# Altium PCB PCB2.PcbDoc
Units mm, origin at the board's own origin, x right, y up, seen from the top; angles counter-clockwise.
Board outline 87.63 x 70.74 mm, 2 copper layers (Top Layer, Bottom Layer); 20 components, 21 nets, 83 pads, 0 vias.
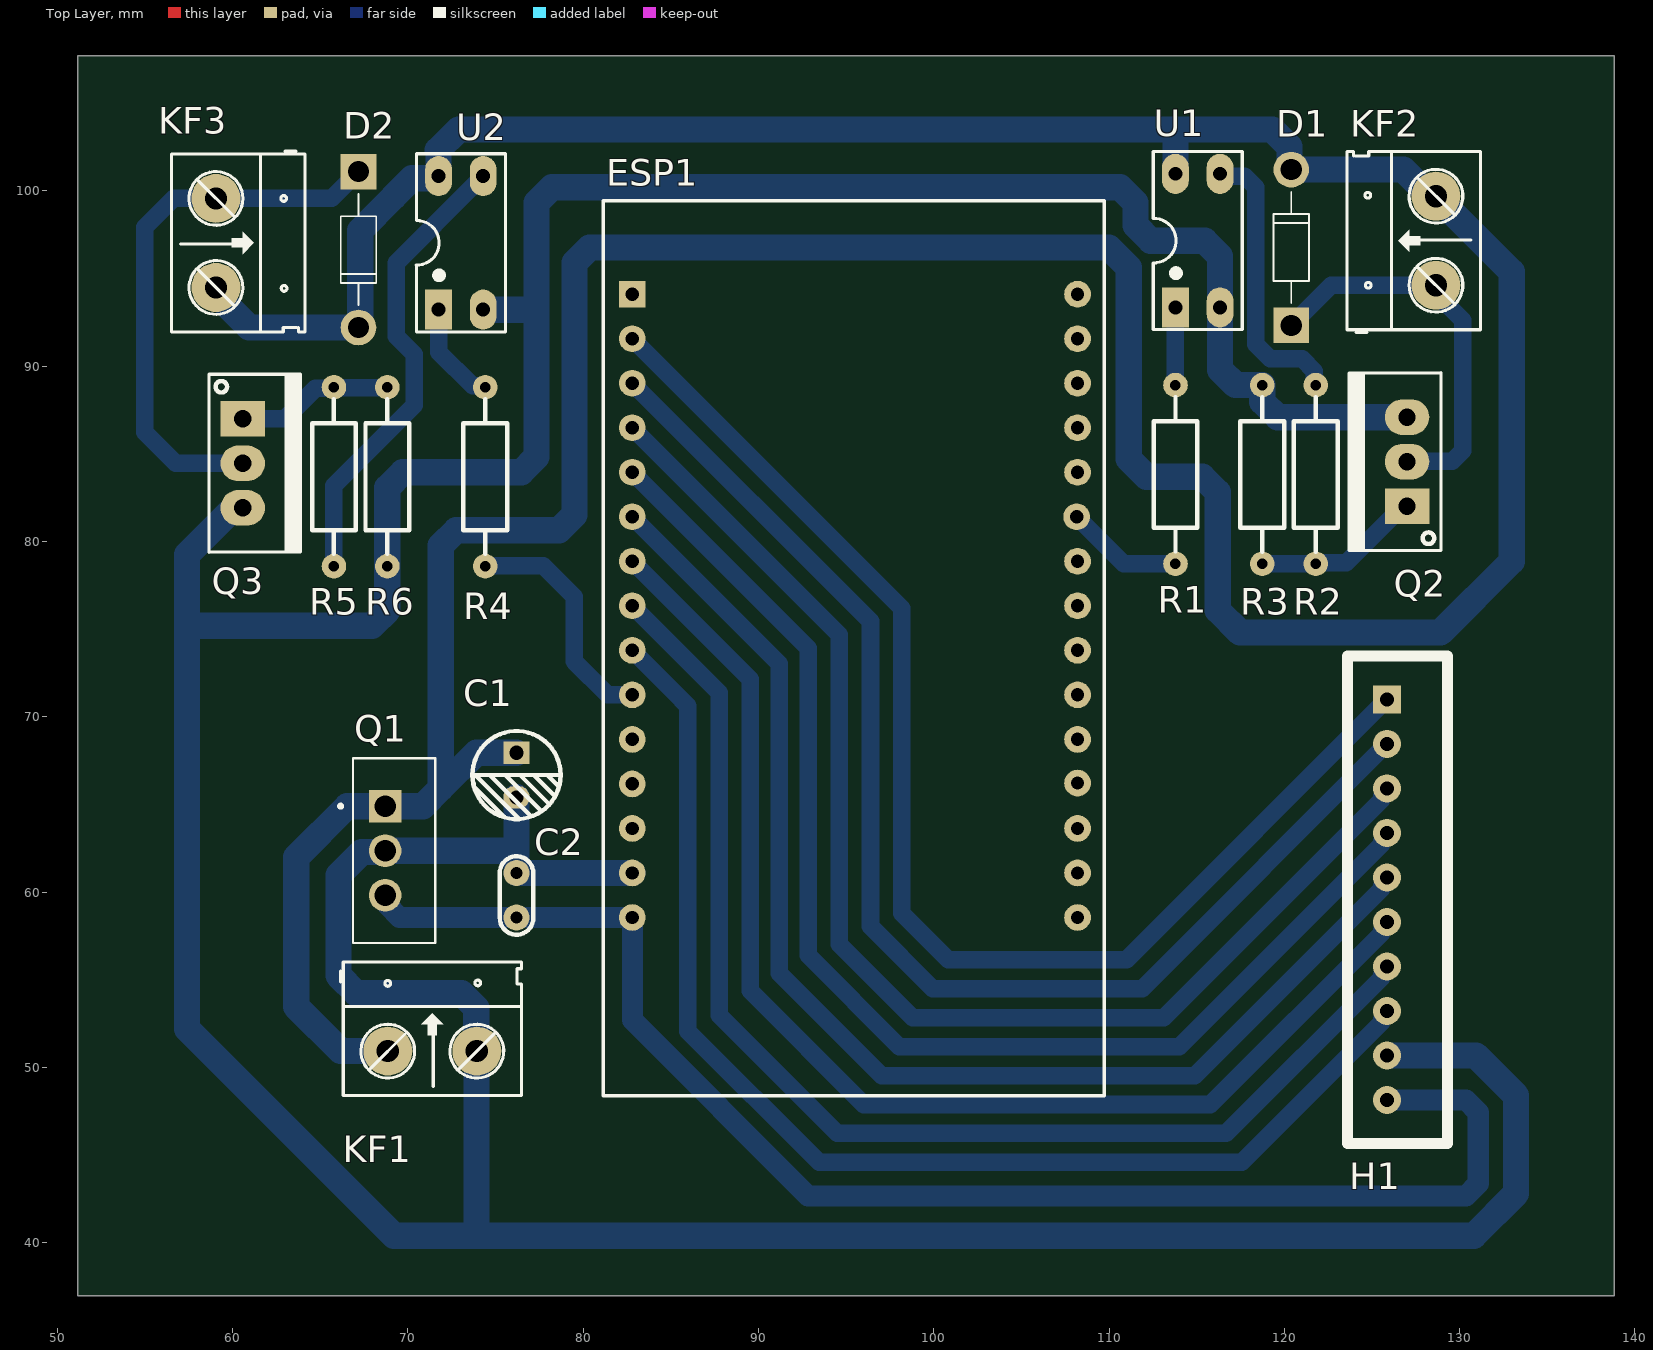
[diagram p0: Top Layer view]
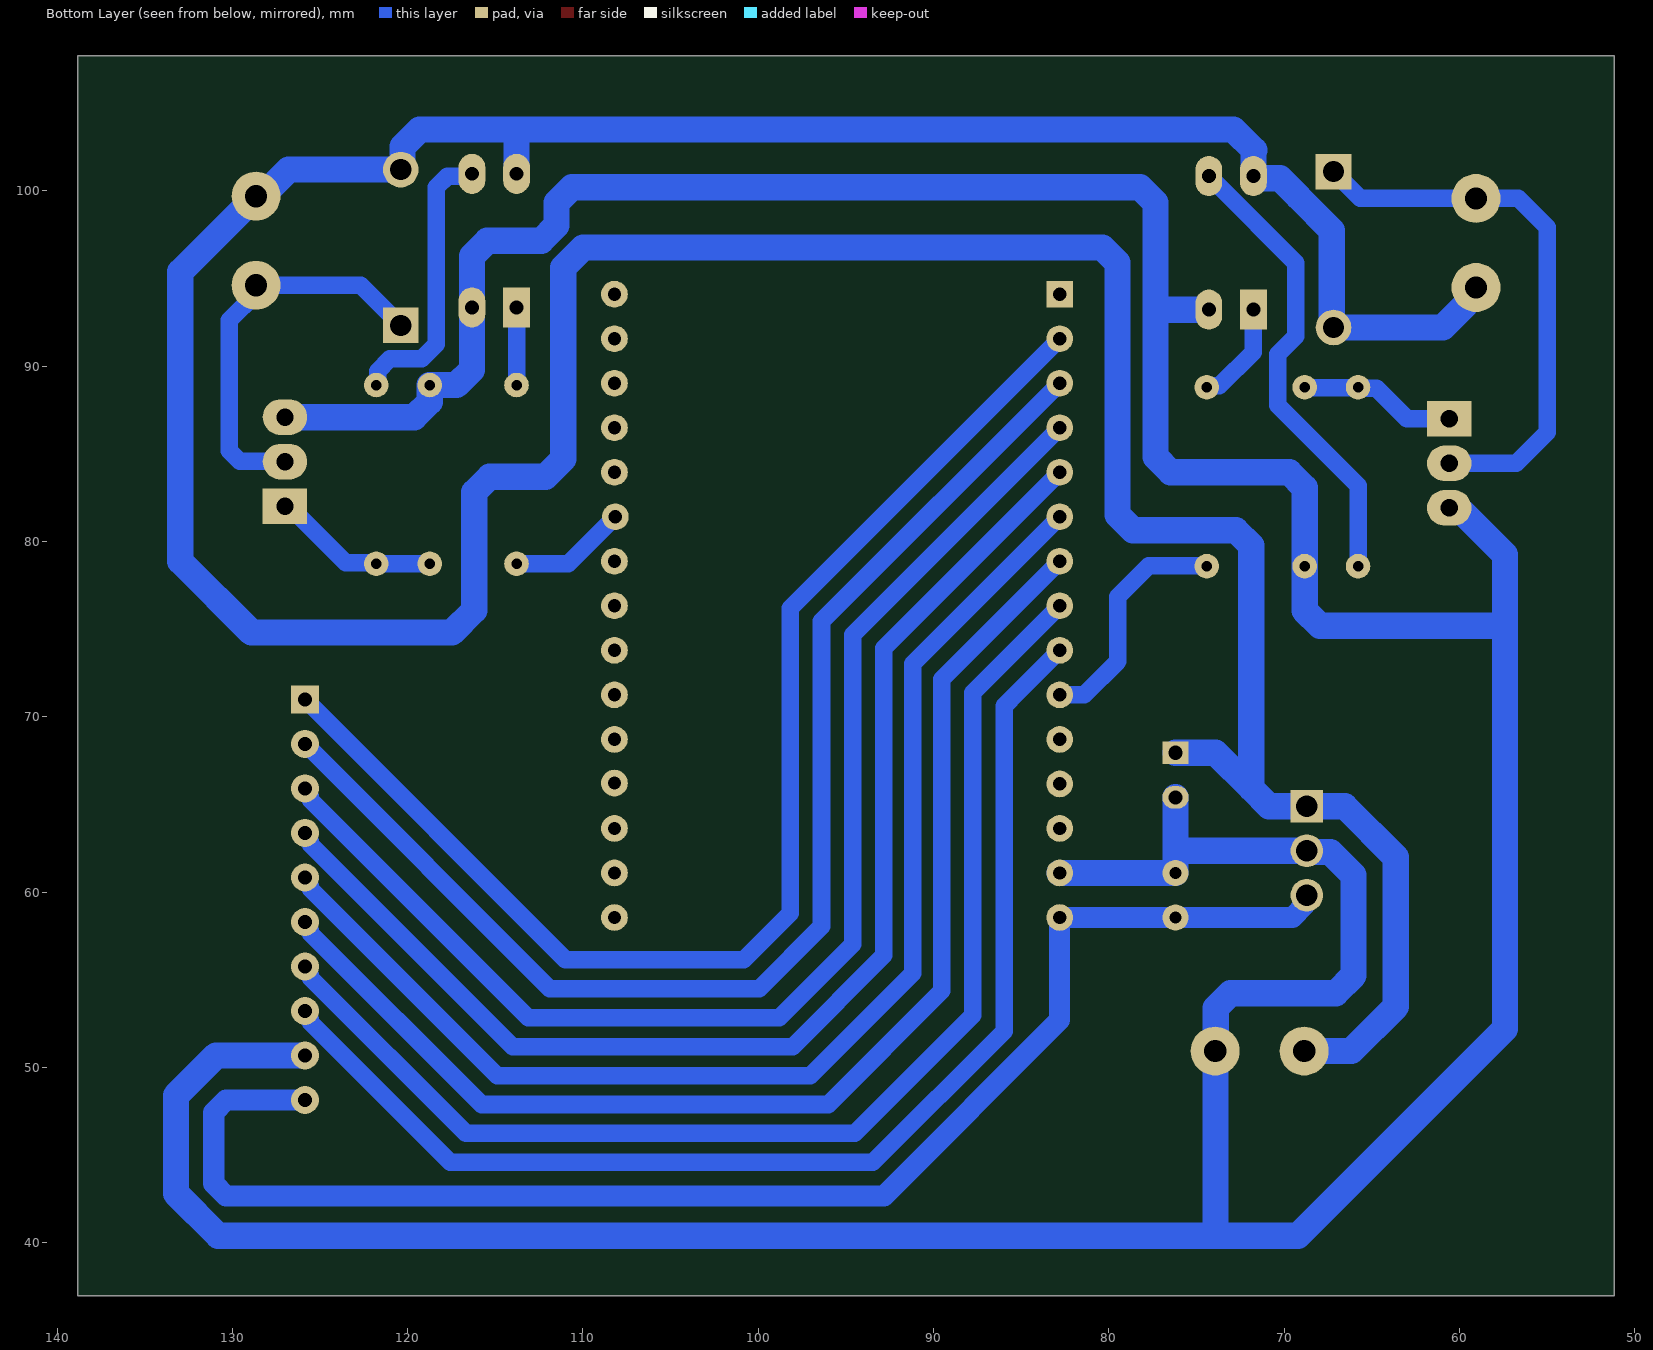
[diagram p1: Bottom Layer view, seen from below]

## Layer stack, top to bottom
Top Solder: solder mask 0.0102, Solder Resist, Dk 3.5
Top Layer: signal copper 0.0356
Dielectric 1: dielectric 0.32, FR-4, Dk 4.8
Bottom Layer: signal copper 0.0356
Bottom Solder: solder mask 0.0102, Solder Resist, Dk 3.5

## Board outline
51.181,36.957 51.181,107.696 138.811,107.696 138.811,36.957

## Design rules (kind name [scope] priority, off if disabled: settings)
Clearance [All] p1: gap=0.254 ignorepadtopadclearanceinfootprint=FALSE except(0: Arc-Hole Track-Hole SMDPad-Hole THPad-Hole Via-Hole Fill-Hole Poly-Hole Region-Hole Text-Hole)
PolygonConnect [All] p1: connectstyle=Relief reliefconductorwidth=0.254 reliefentries=4 polygonreliefangle="90 Angle" airgapwidth=0.254
RoutingVias [All] p1: holewidth=0.711 width=1.27 viastyle="Through Hole" minholewidth=0.711 minwidth=1.27 maxholewidth=0.711 maxwidth=1.27
SolderMaskExpansion [All] p1: expansion=0.102 istentingtop=FALSE
Width 7.4V [InNet('7.4V')] p1: maxlimit=1.5 minlimit=1.2 preferedwidth=1.5
Width 5V [InNet('+5')] p2: maxlimit=1.2 minlimit=1 preferedwidth=1.2
Width GND [InNet('GND')] p3: maxlimit=1.5 minlimit=1.2 preferedwidth=1.2
Width Net [All] p4: maxlimit=1 minlimit=0.8 preferedwidth=1
30 further rules are at their usual default settings.

## Components (designator, comment, footprint, x,y, rotation, side; value= is the part's Value field where it differs from the comment)
C1 "100uF" "tu hoa 5mm" 76.2,66.675 r270 top
C2 "104" "tu gom" 76.2,59.817 r90 top
D1 "100v" "DIODE 1A" 120.396,92.322 r90 top
D2 "100v" "DIODE 1A" 67.183,101.092 r270 top
ESP1 "ESP32 DEVKIT" "ESP32 WROOM 32 KIT" 82.804,94.107 r0 top
H1 "Header 10P 2.54 Duc Thang" XH2.54M-10 125.857,70.993 r270 top
KF1 "CON 2 KF301" "Con 2 KF301 5.08" 68.856,50.927 r0 top
KF2 "CON 2 KF301" "Con 2 KF301 5.08" 128.651,94.615 r90 top
KF3 "CON 2 KF301" "Con 2 KF301 5.08" 59.055,99.568 r270 top
Q1 "LM7805CT/NOPB" TO254P1054X470X1955-3 68.707,62.357 r270 top
Q2 "IRFZ44" TO220 127,82.013 r90 top
Q3 "IRFZ44" TO220 60.579,86.995 r270 top
R1 "220R" "tro vach 1/4w" 113.792,83.82 r90 top
R2 "100R" "tro vach 1/4w" 121.793,83.82 r270 top
R3 "10k" "tro vach 1/4w" 118.745,83.82 r270 top
R4 "220R" "tro vach 1/4w" 74.418,83.693 r90 top
R5 "100R" "tro vach 1/4w" 65.786,83.693 r90 top
R6 "10k" "tro vach 1/4w" 68.834,83.693 r90 top
U1 "OPTO PC817 DIP4" DIP4 113.792,93.287 r0 top value=PC817
U2 "OPTO PC817 DIP4" DIP4 71.755,93.161 r0 top value=PC817

## Footprints (in the part's own frame and the unit in brackets; to place one, negate y for a bottom-side part, rotate by r counter-clockwise, add the part's x,y. Pads: shape width x height; smd on the part's side, far side on the other; paste and mask are expansions set on the pad)
"Con 2 KF301 5.08" [mil]
  round 110 hole 50: 1(0,0) 2(200,0)
  silkscreen extent -106,-100 300,200, body extent -114,-138 294,161, height 114
"DIODE 1A" [mil]
  rect 80x80 hole 47.24: 1(0,0)
  round 80 hole 47.24: 2(350,0)
  silkscreen extent 50,-40 300,40
DIP4 [mil] "W.300/L.400"
  rect 60x90 hole 31: 1(0,2.52)
  oval 60x90 hole 31: 2(100,2.52) 3(100,302.52) 4(0,302.52)
  silkscreen extent -50,-47 150,353, body extent -59,-7 159,307, height 170
"ESP32 WROOM 32 KIT" [mil]
  rect 60x60 hole 30: 1(0,0)
  round 60 hole 30: 2(0,-100) 3(0,-200) 4(0,-300) 5(0,-400) 6(0,-500) 7(0,-600) 8(0,-700) 9(0,-800) 10(0,-900) 11(0,-1000) 12(0,-1100) 13(0,-1200) 14(0,-1300) 15(0,-1400) 16(1000,-1400) 17(1000,-1300) 18(1000,-1200) 19(1000,-1098) 20(1000,-1000) 21(1000,-900) 22(1000,-800) 23(1000,-700) 24(1000,-600) 25(998,-500) 26(1000,-400) 27(1000,-300) 28(1000,-200) 29(1000,-100) 30(1000,0)
  silkscreen extent -65,-1800 1060,210, body extent -64,-1795 1058,210, height 575
TO220 [mil] "TO-220"
  rect 80x100 hole 39: 1(0,0)
  oval 80x100 hole 39: 2(100,0) 3(200,0)
  silkscreen extent -100,-76 300,130, body extent -95,-80 295,97, height 323
TO254P1054X470X1955-3 [mm]
  rect 1.86x1.86 / inner round 1.86 / far side rect 1.86x1.86 hole 1.24: 1(-2.54,0)
  round 1.86 hole 1.24: 2(0,0) 3(2.54,0)
  silkscreen extent -5.27,-2.64 5.27,2.86
"tro vach 1/4w" [mm]
  round 1.4 hole 0.6: 1(-5.1,0) 2(5.1,0)
  silkscreen extent -4.39,-1.25 4.42,1.25, body extent -5.38,-1.2 5.38,1.2, height 2.41
"tu gom" [mm] "Tu gom mini"
  round 1.5 hole 0.7: 1(-1.27,0) 2(1.27,0)
  silkscreen extent -2.25,-0.97 2.22,0.97, body extent -2.92,-0.85 2.92,0.85, height 6.12
"tu hoa 5mm" [mm]
  rect 1.3x1.5 hole 0.8: 1(-1.27,0)
  oval 1.3x1.5 hole 0.8: 2(1.27,0)
  silkscreen extent -2.51,-2.51 2.51,2.51, body extent -3.12,-3.18 3.23,3.18, height 14.55
XH2.54M-10 [mm]
  rect 1.6x1.6 hole 0.8: 1(0,0)
  round 1.6 hole 0.8: 2(2.54,0) 3(5.08,0) 4(7.62,0) 5(10.16,0) 6(12.7,0) 7(15.24,0) 8(17.78,0) 9(20.32,0) 10(22.86,0)
  silkscreen extent -2.48,-2.26 25.34,3.46, body extent -2.48,-2.26 25.34,3.48, height 6.91

## Part data
C1: library part "Tu Hoa 100uF 16V 5x7", "Cắm", Chung_Loai=Cắm, Don_Vi=Con, Ma_Hang=MH001347, So_Chan=2, Ten_Linh_Kien="Tụ Hóa 100uF 16V 5x7MM"
C2: library part "Tu gom 104 50V", "Cắm", Chung_Loai=Cắm, Don_Vi=Con, Ma_Hang=MH004761, So_Chan=2, Ten_Linh_Kien="Tụ gốm 104 100nF 50V"
D1 D2: library part "Diode 1N4007", "Cắm", Chung_Loai=Cắm, Don_Vi=Con, Ma_Hang=MH001063, Ten_Linh_Kien="Diode 1N4007 1A (DIP)"
ESP1: library part "ESP32 WROOM 32 KIT"
H1 KF1 KF2 KF3: "Cắm", Chung_Loai=Cắm, Don_Vi=Con
  H1: Ma_Hang=MH001286, Ten_Linh_Kien="Header 10P XH2.54-10P Đực Thẳng"
  KF1 KF2 KF3: Ma_Hang=MH000987, Ten_Linh_Kien="CON 2 KF301-2P 5.08MM Xanh Dương"
Q1: Package=None, Availability=Unavailable, MF="{'manufacturer': u'Texas Instruments'}", MP=LM7805CT/NOPB, Price=None
Q2 Q3: library part "FET IRFZ44 DIP", "TO-220"
R1 R4: library part "Tro Vach 1/4W 5% 220R", "Cắm", Chung_Loai=Cắm, Don_Vi=Con, Ma_Hang=MH007300, So_Chan=2, Ten_Linh_Kien="Trở Vạch 1/4w 5% 220R"
R2 R5: library part "Tro Vach 1/4W 5% 100R", "Cắm", Chung_Loai=Cắm, Don_Vi=Con, Ma_Hang=MH007353, So_Chan=2, Ten_Linh_Kien="Trở Vạch 1/4w 5% 100R"
R3 R6: library part "Tro Vach 1/4W 1% 10k", "Cắm", Chung_Loai=Cắm, Don_Vi=Con, Ma_Hang=MH006349, So_Chan=2, Ten_Linh_Kien="Trở Vạch 1/4w 1% 10k"
U1 U2: "Single Opto"

## Nets (pads, with @x,y where several pads share a name; then routed paths per layer and width w, separated by ;. In a path a pad name is that pad's centre, name@x,y a point inside that pad or via, vN(x,y) a via of type N, cw(c..) or ccw(c..) an arc to the next point about the centre after c; other vN are vias at no path point)
7.4V: C1.1 D1.2 D2.2 KF1.1 KF2.2 KF3.2 Q1.1 U1.4 U2.4 | length 248.6
  Bottom Layer w1.5: KF3.2 59.055,94.138 59.702,93.491 59.702,93.46 60.96,92.202 D2.2 ; D2.2@67.102,92.121 67.281,92.3 67.281,97.738 69.203,99.66 69.203,99.683 70.24,100.72 71.744,100.72 71.755,100.731 71.755,100.965 71.75,100.97 71.75,102.268 71.706,102.313 72.898,103.505 113.792,103.505 ; KF1.1 66.167,50.927 63.627,53.467 63.627,61.976 66.548,64.897 Q1.1 70.866,64.897 71.882,65.913 ; C1.1 73.914,67.945 71.882,65.913 ; U1.4 113.792,103.505 ; 71.882,65.913 71.882,79.766 72.761,80.645 78.623,80.645 79.502,81.524 79.502,95.895 80.381,96.774 109.982,96.774 111.125,95.631 111.125,84.709 112.141,83.693 115.316,83.693 116.205,82.804 116.205,76.073 117.475,74.803 128.905,74.803 132.969,78.867 132.969,95.377 KF2.2 128.301,99.695 126.783,101.212 D1.2 120.294,101.314 120.294,102.523 119.312,103.505 113.792,103.505
+5: C2.1 ESP1.15 H1.10 Q1.3 | length 83
  Bottom Layer w1.2: Q1.3 68.833,59.691 68.833,59.25 69.536,58.547 C2.1 ESP1.15 82.804,52.705 92.837,42.672 130.361,42.672 131.064,43.375 131.064,47.43 130.361,48.133 H1.10
cb2: ESP1.3 H1.2 | length 73.3
  Bottom Layer w1: ESP1.3 96.393,75.438 96.393,58.039 99.949,54.483 111.887,54.483 H1.2
cb3: ESP1.4 H1.3 | length 73
  Bottom Layer w1: ESP1.4 94.615,74.676 94.615,57.023 98.806,52.832 113.118,52.832 125.557,65.271 125.557,65.451 125.857,65.751 H1.3
cb4: ESP1.5 H1.4 | length 72.1
  Bottom Layer w1: ESP1.5 92.837,73.914 92.837,56.388 98.044,51.181 114.007,51.181 125.557,62.731 125.557,62.911 125.857,63.211 H1.4
cb5: ESP1.6 H1.5 | length 71.5
  Bottom Layer w1: ESP1.6 91.186,73.025 91.186,55.372 97.028,49.53 114.896,49.53 125.557,60.191 125.557,60.371 125.857,60.671 H1.5
cb6: ESP1.7 H1.6 | length 70.8
  Bottom Layer w1: ESP1.7 89.535,72.136 89.535,54.356 96.012,47.879 115.785,47.879 125.557,57.651 125.557,57.831 125.857,58.131 H1.6
cb7: ESP1.8 H1.7 | length 70.5
  Bottom Layer w1: ESP1.8 87.757,71.374 87.757,52.959 94.488,46.228 116.674,46.228 125.557,55.111 125.557,55.291 125.857,55.591 H1.7
cb8: ESP1.9 H1.8 | length 69.8
  Bottom Layer w1: ESP1.9 85.14,71.451 85.979,70.612 85.979,52.07 93.472,44.577 117.563,44.577 125.557,52.571 125.557,52.751 125.857,53.051 H1.8
GND: C1.2 C2.2 ESP1.14 H1.9 KF1.2 Q1.2 Q2.3 Q3.3 R3.1 R6.1 U1.2 U2.2 | length 281.7
  Bottom Layer w1.5: Q3.3@60.169,81.903 59.915,81.649 59.805,81.649 57.404,79.248 57.404,75.184 ; U2.2 74.302,93.218 77.343,93.218 ; C1.2 76.2,62.357 ; ESP1.14 C2.2 76.2,62.357 ; H1.9 130.937,50.673 133.223,48.387 133.223,42.799 130.81,40.386 73.914,40.386 ; Q2.3 119.624,87.093 118.745,87.971 R3.1 117.211,88.92 116.332,89.799 U1.2 116.332,96.276 115.453,97.155 112.385,97.155 111.506,98.034 111.506,99.324 110.627,100.203 78.222,100.203 77.343,99.324 77.343,93.218 ; 57.404,75.184 67.955,75.184 68.834,76.063 R6.1 68.834,83.068 69.713,83.947 76.464,83.947 77.343,84.826 77.343,93.218 ; 57.404,75.184 57.404,52.197 69.215,40.386 73.914,40.386 ; 73.914,40.386 73.914,50.905 KF1.2 73.904,50.959 73.904,53.383 73.057,54.229 67.056,54.229 66.04,55.245 66.04,60.96 67.368,62.288 68.638,62.288 Q1.2 76.2,62.357
Motor1: ESP1.25 R1.1 | length 6.8
  Bottom Layer w1: ESP1.25 110.84,78.72 R1.1
Motor2: ESP1.10 R4.1 | length 13.6
  Bottom Layer w1: R4.1 74.438,78.613 77.724,78.613 79.502,76.835 79.502,73.152 81.407,71.247 ESP1.10
NetD1_1: D1.1 KF2.1 Q2.2 | length 22.7
  Bottom Layer w1: D1.1 122.689,94.615 KF2.1 128.651,94.13 130.175,92.606 130.175,85.17 129.589,84.584 127.032,84.584 Q2.2
NetD2_1: D2.1 KF3.1 Q3.2 | length 31.5
  Bottom Layer w1: Q3.2 56.769,84.455 54.991,86.233 54.991,97.917 56.642,99.568 65.659,99.568 D2.1
NetQ2_1: Q2.1 R2.2 R3.2 | length 9.6
  Bottom Layer w1: R3.2 R2.2 121.87,78.797 123.53,78.797 126.746,82.013 Q2.1
NetQ3_1: Q3.1 R5.2 R6.2 | length 9.1
  Bottom Layer w1: Q3.1 62.992,86.995 64.732,88.735 65.702,88.735 R5.2@65.836,88.87 ; R5.2 65.806,88.773 R6.2@68.854,88.773
NetR1_2: R1.2 U1.1 | length 4.4
  Bottom Layer w1: R1.2 U1.1
NetR2_1: R2.1 U1.3 | length 16.1
  Bottom Layer w1: U1.3 116.465,100.838 117.729,100.838 118.364,100.203 118.364,91.256 119.196,90.424 121.014,90.424 121.716,89.722 121.716,88.997 R2.1
NetR4_2: R4.2 U2.1 | length 5.9
  Bottom Layer w1: U2.1 71.755,90.805 73.69,88.87 74.341,88.87 R4.2
NetR5_1: R5.1 U2.3 | length 26.9
  Bottom Layer w1: R5.1 65.786,83.185 70.358,87.757 70.358,90.678 69.342,91.694 69.342,95.885 73.821,100.364 74.053,100.364 74.295,100.606 U2.3 U2.3@74.295,100.965
"": ESP1.2 H1.1 | length 74.1
  Bottom Layer w1: ESP1.2 98.171,76.2 98.171,58.801 100.838,56.134 110.998,56.134 H1.1
pads on no net: ESP1.1 ESP1.11 ESP1.12 ESP1.13 ESP1.16 ESP1.17 ESP1.18 ESP1.19 ESP1.20 ESP1.21 ESP1.22 ESP1.23 ESP1.24 ESP1.26 ESP1.27 ESP1.28 ESP1.29 ESP1.30

## Silkscreen, mask and mechanical layers (free items; w line width, h text height)
Mechanical 1:
  the board outline again, w1.27